# EAGLE board 614-Combiner_133-360-431MHz (EAGLE 8.7.1)
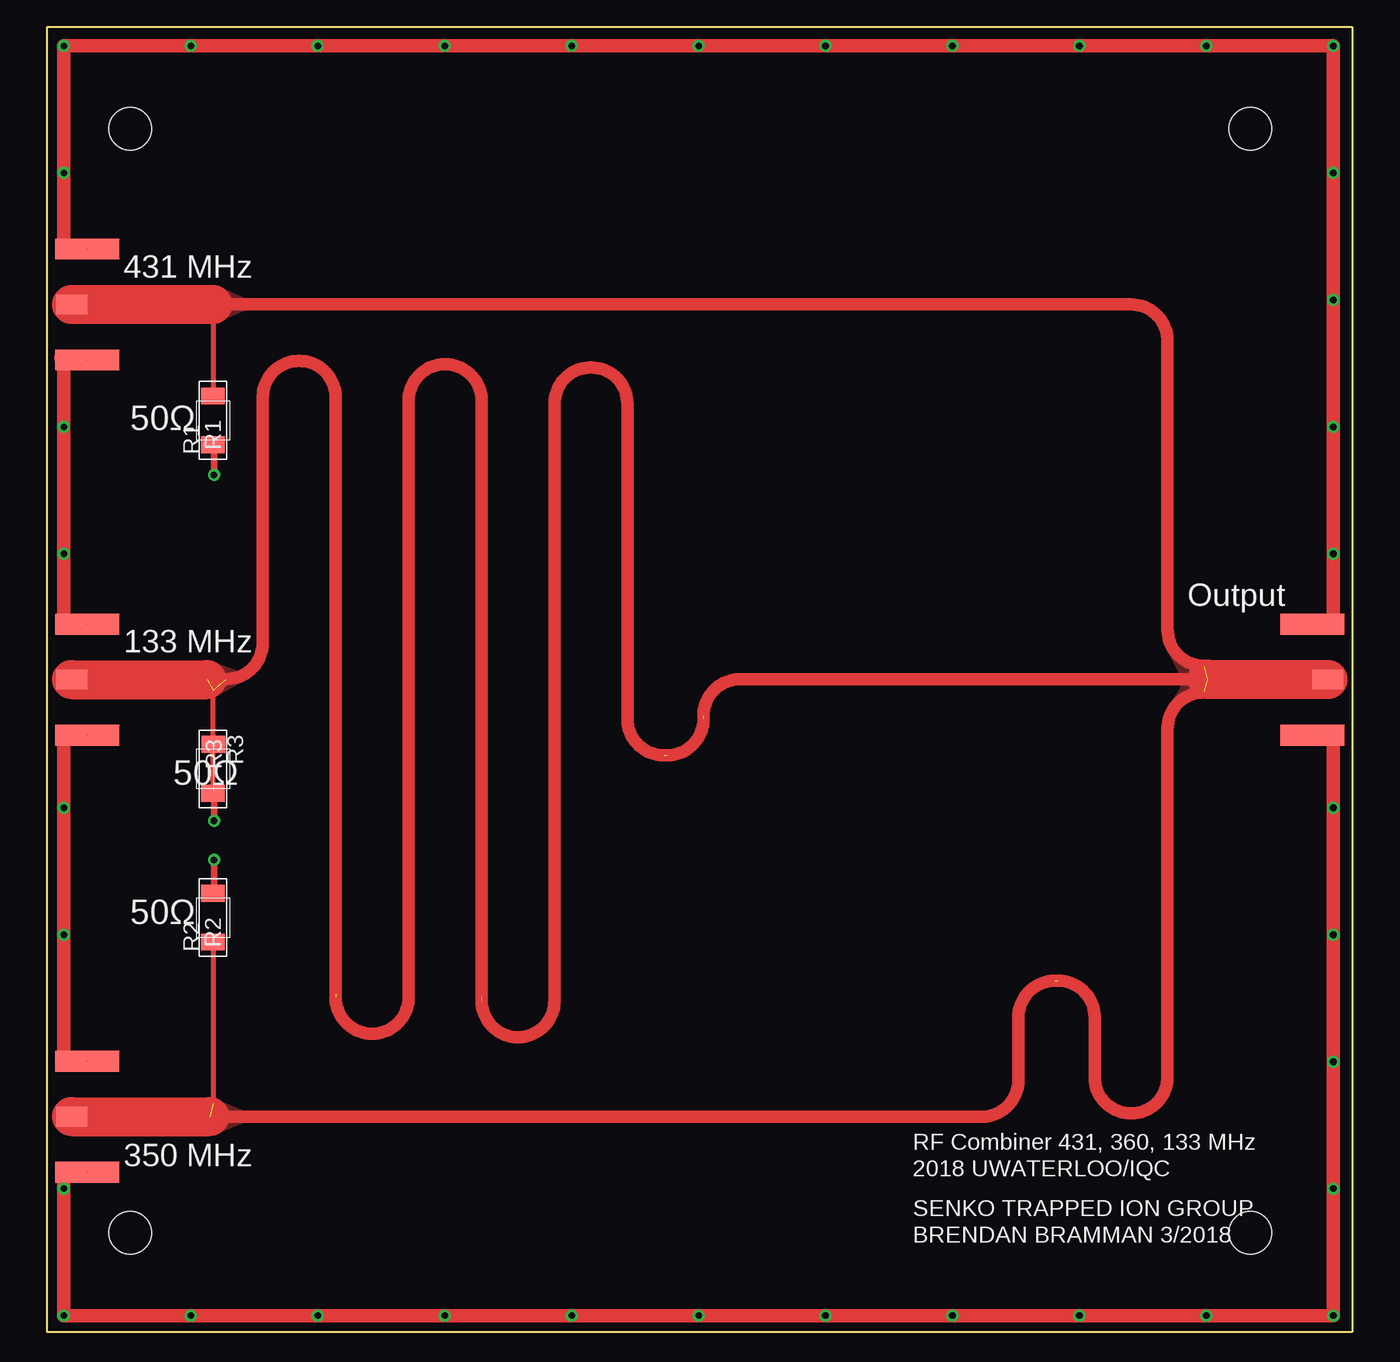
[diagram p0: board, top side]
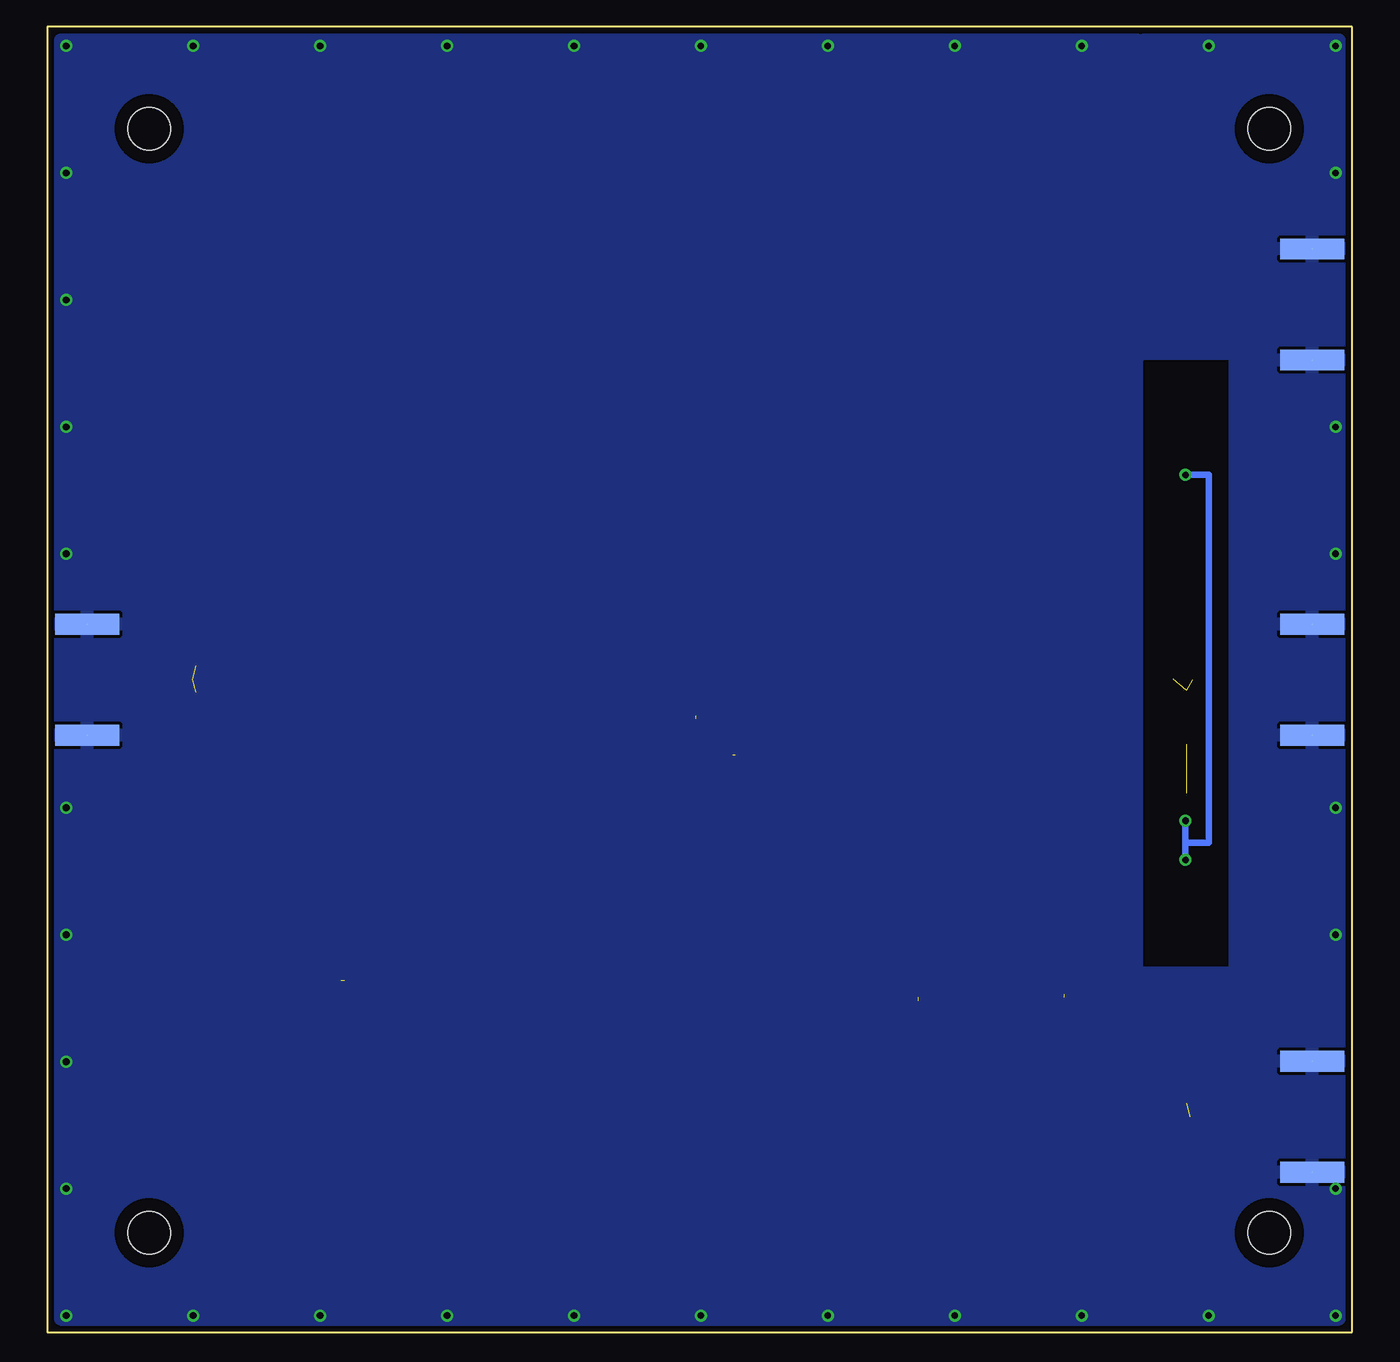
[diagram p1: board, bottom side, seen from below]

No outline drawn. Coordinates in mm, seen from the top.
Copper layers (1*16): Top 0.035mm / dielectric 1.5mm / Bottom 0.035mm
Design rules "default": minimum track width 6mil, minimum drill 0.35mm, track to track 6mil, track to pad 6mil, pad to pad 6mil, via to via 6mil, smd to smd 6mil, copper to edge 40mil, drill to drill 6mil, minimum pad ring 10mil, minimum via ring 8mil, stop-mask expansion 4mil, vias tented up to drill 0mil, thermal gap 10mil
Holes 3.26 mm at 6.35,92.2 92.2,92.2 92.2,7.62 6.35,7.62
Milling: 4 lines

## Footprints (pad centres in the part's own frame; a part is rotated, then mirrored left to right if it is on the bottom)
SMA-END = smd 1.6 x 4.902 bottom: P$2 -4.255,3.039; P$3 4.255,3.039 | smd 1.6 x 4.902: P$4 4.255,3.039; P$5 -4.255,3.039 | smd 1.499 x 2.362: SIGNAL 0,1.854
R1206 = smd 1.295 x 1.803: P$1 -1.854,0.025; P$2 1.88,0

## Placement (x,y rotation side)
J1  SMA-END  [SMA-END]  0,78.74 270 top
J2  SMA-END  [SMA-END]  0,50 270 top
J3  SMA-END  [SMA-END]  0,16.51 270 top
J4  SMA-END  [SMA-END]  100,50 90 top
R1  50 Ohm  [R1206]  12.7,69.85 90 top
R2  50 Ohm  [R1206]  12.7,31.75 90 top
R3  50 Ohm  [R1206]  12.7,43.18 270 top

## Library data of the parts
J1-J4 = lib; PARTNUM: ACX1911-ND
R1-R3 = lib; POWER: 1W; SIZE: 1206; TOLERANCE: 1%

## Nets
GROUND: J1.P$2 J1.P$3 J1.P$4 J1.P$5 J2.P$2 J2.P$3 J2.P$4 J2.P$5 J3.P$2 J3.P$3 J3.P$4 J3.P$5 J4.P$2 J4.P$3 J4.P$4 J4.P$5
N$1: J1.SIGNAL J2.SIGNAL J3.SIGNAL J4.SIGNAL R1.P$1 R1.P$2 R2.P$1 R2.P$2 R3.P$1 R3.P$2

## Tracks (layer width: path | path; a pad name or v marks a point on that pad's centre or on a via)
GROUND  (via drill 0.51)  (8 unrouted)
  Top 1.016: 1.52,82.8 1.27,83.06 v1.27,98.55 v98.55,98.55 v98.55,59.64 98.55,54.36 | 1.02,74.68 1.27,74.42 v1.27,69.37 1.27,54.36 | 1.27,45.47 v1.27,40.18 1.27,20.73 | 1.27,12.19 v1.27,11 v1.27,1.27 v98.55,1.27 98.55,45.47
  other vias: 1.27,88.82 1.27,59.64 1.27,30.45 11,1.27 20.73,1.27 30.45,1.27 40.18,1.27 49.91,1.27 59.64,1.27 69.37,1.27 79.1,1.27 88.82,1.27 98.55,11 98.55,20.73 98.55,30.45 98.55,40.18 98.55,69.37 98.55,79.1 98.55,88.82 88.82,98.55 79.1,98.55 69.37,98.55 59.64,98.55 49.91,98.55 40.18,98.55 30.45,98.55 20.73,98.55 11,98.55
  pour Bottom: 1,1 1,99 9,99 9,1
  pour Bottom: 16.5,1 16.5,99 99,99 99,1
  pour Bottom: 1,1 1,27.5 16,27.5 16.5,27.5 16.5,1
  pour Bottom: 9,99 16,99 16,75 9,75
N$1  (via drill 0.51)  (11 unrouted)
  Top 0.381: 12.7,78.74 R1.P$2 | R3.P$2 12.72,49.17 12.45,49.02 | R2.P$1 12.7,29.87 12.7,17.53
  Top 0.508: v12.77,65.68 12.77,68 R1.P$1 | v12.77,39.18 12.77,41.3 R3.P$2 | v12.77,36.18 12.77,33.63 R2.P$2
  Top 0.94: 88.65,51.05 arc-90 85.85,53.85 85.85,75.95 arc90 83.06,78.74 12.7,78.74 | 33.27,25.65 33.27,71.37 arc90 30.48,74.17 arc90 27.69,71.37 27.69,25.65 arc-90 24.89,22.86 arc-90 22.1,25.65 | 47.24,44.2 arc-90 44.45,46.99 44.45,71.12 arc90 41.66,73.91 arc90 38.86,71.12 38.86,25.4 arc-90 36.07,22.61 arc-90 33.27,25.4 | 50.29,47.24 arc-90 53.09,50.04 88.9,50.04 | 77.22,26.92 arc90 74.42,24.13 74.42,19.3 arc-90 71.63,16.51 12.45,16.51 | 88.65,49.02 arc90 85.85,46.23 85.85,19.56 arc-90 83.06,16.76 arc-90 80.26,19.56 80.26,24.13 arc90 77.47,26.92 | 13.72,50.04 arc90 16.51,52.83 16.51,71.63 arc-90 19.3,74.42 arc-90 22.1,71.63 22.1,25.91 | 47.5,44.2 arc90 50.29,46.99
  Top 2.985: J3.SIGNAL 12.45,16.51 | J2.SIGNAL 12.23,50 | J1.SIGNAL 12.7,78.74 | J4.SIGNAL 88.9,50 88.9,50.04
  Bottom 0.508: v12.77,36.18 12.77,37.5 | 12.77,37.5 v12.77,39.18 | v12.77,65.68 11,65.68 11,37.5 12.77,37.5
  pour Top: 85.72,52.58 87.12,49.78 85.85,47.62 89.53,50.67
  pour Top: 12.7,51.31 14.73,50.55 14.73,49.78 12.95,48.77
  pour Top: 13.21,80.01 15.49,78.99 15.49,78.49 13.72,77.72
  pour Top: 13.08,17.78 15.49,16.76 15.49,16.26 13.08,15.24

## Text on the board
tPlace: 431 MHz | 50Ω | Output | 133 MHz | 50Ω | 50Ω | RF Combiner 431, 360, 133 MHz | 350 MHz | 2018 UWATERLOO/IQC | SENKO TRAPPED ION GROUP | BRENDAN BRAMMAN 3/2018